# Altium PCB Inverted_Pendulum_Cape.PcbDoc
Units mil, origin at the board's own origin, x right, y up, seen from the top; angles counter-clockwise.
Board outline 3400 x 2150 mil, 2 copper layers (Top, Bottom), stack 61.902 mil thick; 17 components, 22 nets, 143 pads, 7 vias.
Unrouted connection lines stored in the file: 1.
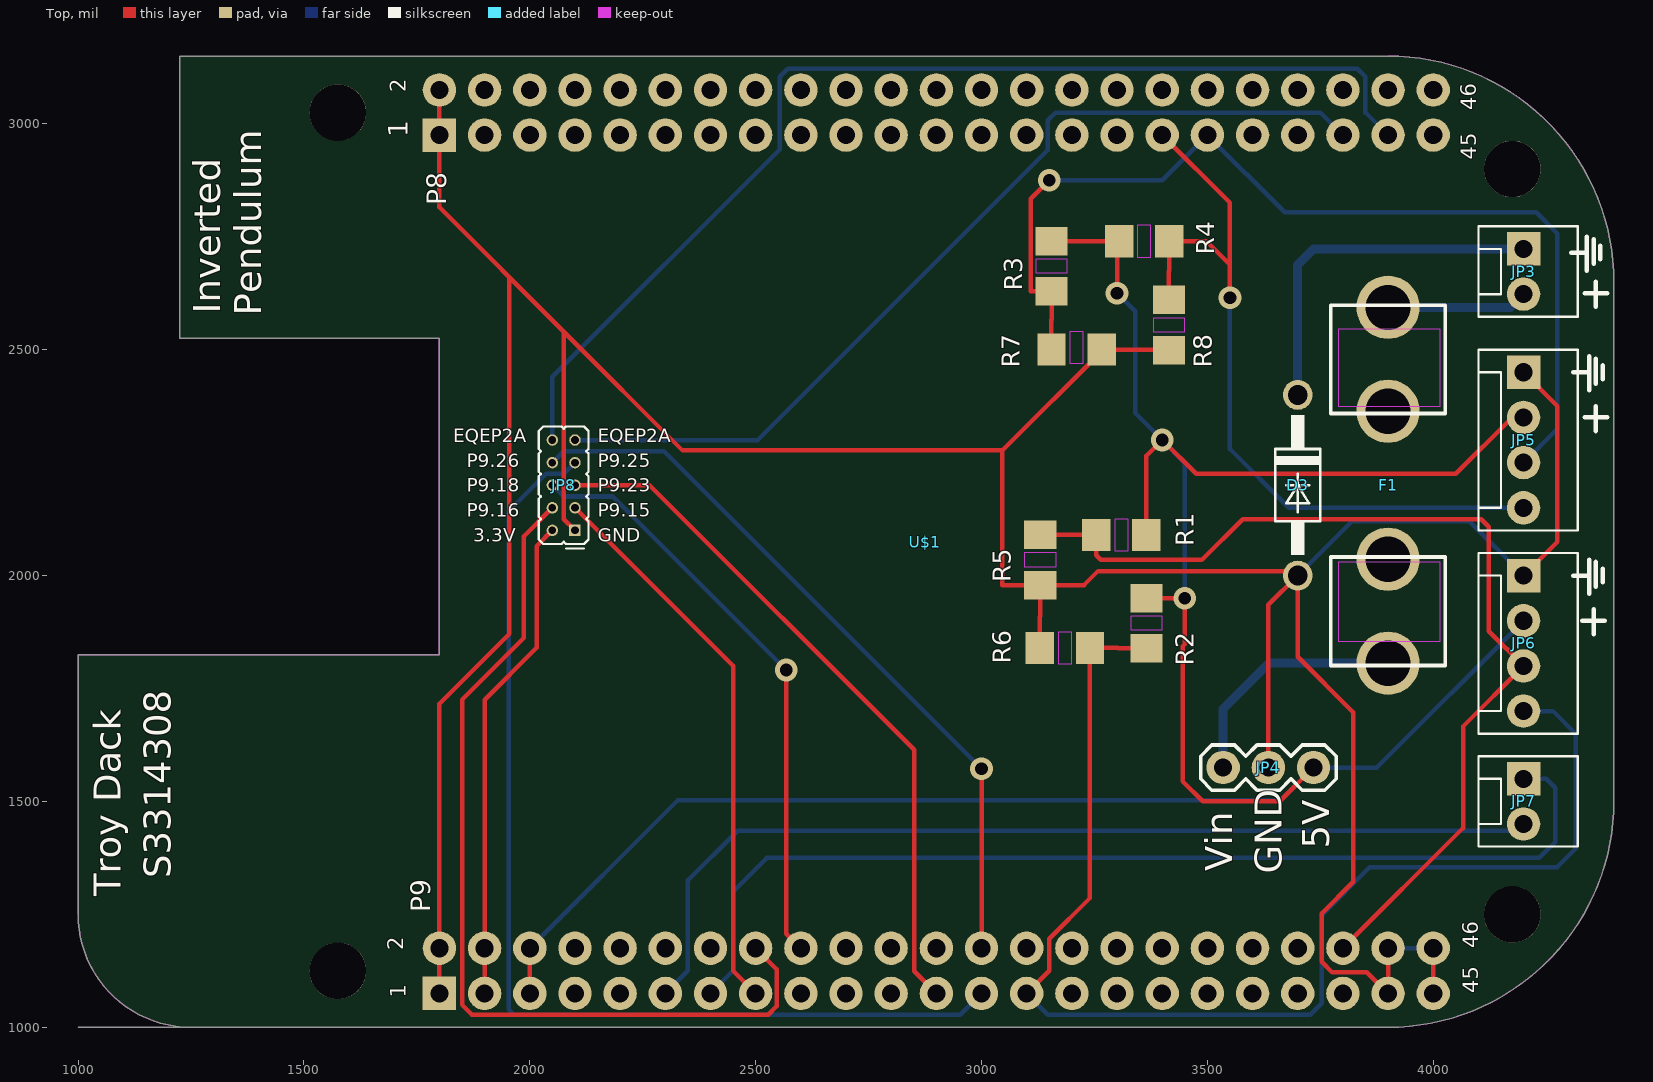
[diagram p0: Top view]
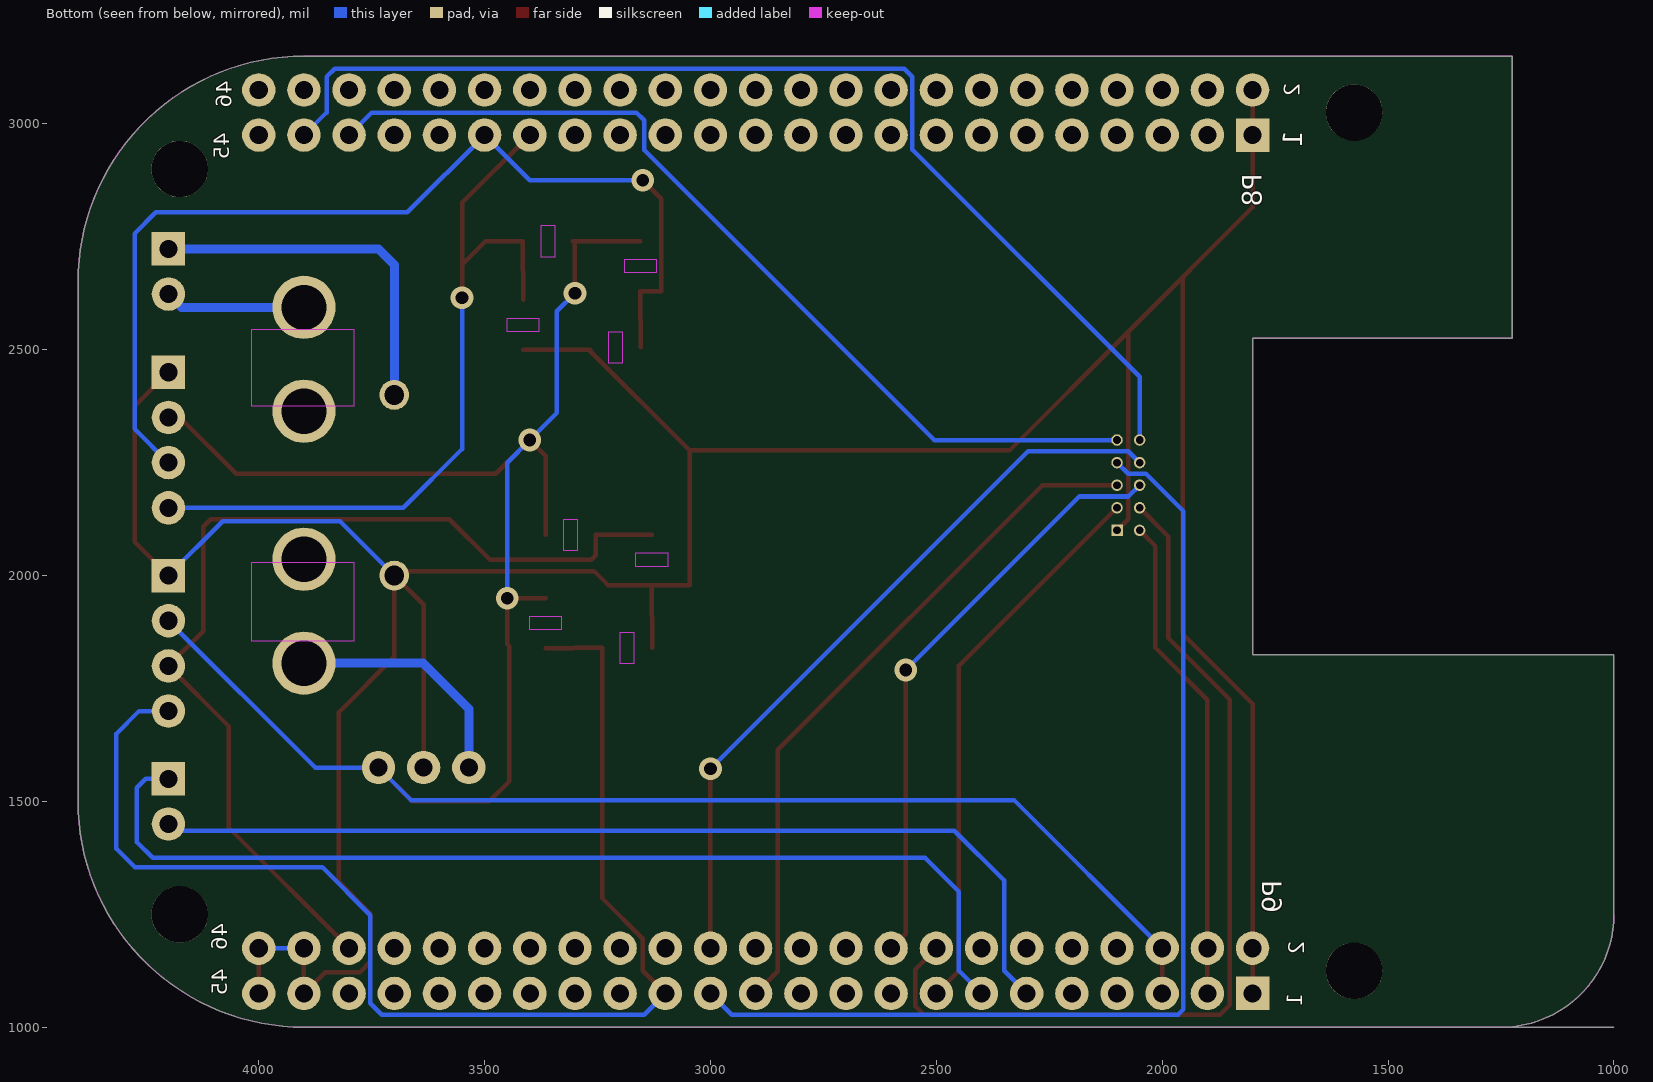
[diagram p1: Bottom view, seen from below]

## Layer stack, top to bottom
Top: signal copper 1.4016
Dielectric: core 59.0984, FR-4, Dk 4.8
Bottom: signal copper 1.4016

## Board outline
1250,1000 cw(c1250,1250) 1000,1250 1000,1825 1800,1825 1800,2525 1225,2525 1225,3150 3900,3150 cw(c3900,2650) 4400,2650 4400,1500 cw(c3900,1500) 3900,1000 1000,1000

## Design rules (kind name [scope] priority, off if disabled: settings)
AssemblyTestPointUsage SilkToBoardRegionClearance [All] p2:
AssemblyTestPointUsage UnpouredPolygon [All] p3:
Clearance [All] p1: gap=5
FabricationTestPointUsage TestPointUsage [All] p1: valid=0 allowmultiple=FALSE
FabricationTestpoint Testpoint [(IsPad And (OnTopLayer Or OnBottomLayer))] p1: side=3 testpointundercomponent=TRUE minsize=40 maxsize=100 preferedsize=60 minholesize=0 maxholesize=40 preferedholesize=32 testpointgrid=1 allowsidetop=TRUE allowsidebottom=TRUE usegrid=TRUE gridtolerance=0.01
PlaneClearance [All] p1: clearance=59.06
PlaneConnect [All] p1: planeconnectstyle=Relief reliefexpansion=20 reliefentries=4 reliefconductorwidth=39.37 reliefairgap=10
PolygonConnect [All] p1: connectstyle=Direct reliefconductorwidth=59.06 reliefentries=4 polygonreliefangle="90 Angle" airgapwidth=10
RoutingLayers Power [InNet('3.3V') Or InNet('5V') Or InNet('VIN')] p1: top layer_v5=TRUE bottom layer_v5=TRUE
RoutingLayers GND [InNet('GND')] p2: top layer_v5=TRUE bottom layer_v5=TRUE
RoutingLayers [All] p3: top layer_v5=TRUE bottom layer_v5=TRUE
RoutingVias [All] p1: holewidth=28 width=50 viastyle="Through Hole" minholewidth=28 minwidth=50 maxholewidth=28 maxwidth=50
SMDNeckDown [All] p1: percent=50.000
SilkToSolderMaskClearance SilkscreenOverComponentPads [IsPad] p1: minsilkscreentomaskgap=10 clearancetoexposedcopper=TRUE
SolderMaskExpansion [All] p1: expansion=4
Width "Input Power" [InNet('NetF1_1') Or InNet('NetD3_C') Or InNet('VIN')] p1: maxlimit=40 minlimit=10 preferedwidth=20 minimp=50.000000 maximp=50.000000 favimp=50.000000
Width [All] p2: maxlimit=196.85 minlimit=10 preferedwidth=10 minimp=50.000000 maximp=50.000000 favimp=50.000000
22 further rules are at their usual default settings.

## Components (designator, comment, footprint, x,y, rotation, side; value= is the part's Value field where it differs from the comment)
D3 "1N4004" DO41-10 3700,2200 r270 top
F1 "FUSEX20MM" FUSE_5MM 3900,2200 r180 top
JP3 "Vin" MOLEX-1X2 4200,2723 r270 top
JP4 "Regulator" 1X03 3735,1575 r180 top
JP5 "Enc2" MOLEX-1X4 4200,2450 r270 top
JP6 "Enc1" MOLEX-1X4 4200,2000 r270 top
JP7 "UART" MOLEX-1X2 4200,1550 r270 top
JP8 "Keys" 2X5_PTH_SILK_.05 2100,2350 r180 top
R1 "RESISTOR1206" 1206 3310,2090 r180 top
R2 "RESISTOR1206" 1206 3365,1895 r270 top
R3 "RESISTOR1206" 1206 3155,2685 r270 top
R4 "RESISTOR1206" 1206 3360,2740 r0 top
R5 "RESISTOR1206" 1206 3130,2035 r270 top
R6 "RESISTOR1206" 1206 3185,1840 r180 top
R7 "RESISTOR1206" 1206 3210,2500 r0 top
R8 "RESISTOR1206" 1206 3415,2555 r270 top
U$1 "BEAGLE_BONE_BLACK_CAPE" BEAGLE_BONE_BLACK_CAPE 1000,1000 r0 top locked

## Footprints (in the part's own frame and the unit in brackets; to place one, negate y for a bottom-side part, rotate by r counter-clockwise, add the part's x,y. Pads: shape width x height; smd on the part's side, far side on the other; paste and mask are expansions set on the pad)
1X03 [mil] "1X03"
  round 74 hole 40: 1(0,0) 2(100,0) 3(200,0)
  silkscreen extent -50,-50 250,50
2X5_PTH_SILK_.05 [mil] "2X5_PTH_SILK_.05"
  rect 25.5x25.5 hole 17: 1(0,250)
  round 25.5 hole 17: 2(50,250) 3(0,200) 4(50,200) 5(0,150) 6(50,150) 7(0,100) 8(50,100) 9(0,50) 10(50,50)
  silkscreen extent -30,20 80,290
1206 [mil]
  rect 63x71 smd: 1(-55.12,0) 2(56,0)
BEAGLE_BONE_BLACK_CAPE [mil] "BEAGLE_BONE_BLACK_CAPE"
  round 125 hole 125: 1(575,125) 1(575,2025) 1(3175,250) 1(3175,1900)
  rect 74x74 hole 40: P8.1(800,1975) P9.1(800,75)
  round 74 hole 40: P8.2(800,2075) P8.3(900,1975) P8.4(900,2075) P8.5(1000,1975) P8.6(1000,2075) P8.7(1100,1975) P8.8(1100,2075) P8.9(1200,1975) P8.10(1200,2075) P8.11(1300,1975) P8.12(1300,2075) P8.13(1400,1975) P8.14(1400,2075) P8.15(1500,1975) P8.16(1500,2075) P8.17(1600,1975) P8.18(1600,2075) P8.19(1700,1975) P8.20(1700,2075) P8.21(1800,1975) P8.22(1800,2075) P8.23(1900,1975) P8.24(1900,2075) P8.25(2000,1975) P8.26(2000,2075) P8.27(2100,1975) P8.28(2100,2075) P8.29(2200,1975) P8.30(2200,2075) P8.31(2300,1975) P8.32(2300,2075) P8.33(2400,1975) P8.34(2400,2075) P8.35(2500,1975) P8.36(2500,2075) P8.37(2600,1975) P8.38(2600,2075) P8.39(2700,1975) P8.40(2700,2075) P8.41(2800,1975) P8.42(2800,2075) P8.43(2900,1975) P8.44(2900,2075) P8.45(3000,1975) P8.46(3000,2075) P9.2(800,175) P9.3(900,75) P9.4(900,175) P9.5(1000,75) P9.6(1000,175) P9.7(1100,75) P9.8(1100,175) P9.9(1200,75) P9.10(1200,175) P9.11(1300,75) P9.12(1300,175) P9.13(1400,75) P9.14(1400,175) P9.15(1500,75) P9.16(1500,175) P9.17(1600,75) P9.18(1600,175) P9.19(1700,75) P9.20(1700,175) P9.21(1800,75) P9.22(1800,175) P9.23(1900,75) P9.24(1900,175) P9.25(2000,75) P9.26(2000,175) P9.27(2100,75) P9.28(2100,175) P9.29(2200,75) P9.30(2200,175) P9.31(2300,75) P9.32(2300,175) P9.33(2400,75) P9.34(2400,175) P9.35(2500,75) P9.36(2500,175) P9.37(2600,75) P9.38(2600,175) P9.39(2700,75) P9.40(2700,175) P9.41(2800,75) P9.42(2800,175) P9.43(2900,75) P9.44(2900,175) P9.45(3000,75) P9.46(3000,175)
DO41-10 [mil] "DO41-10"
  round 66 hole 44: A(200,0) C(-200,0)
  silkscreen extent -155,-50 155,50
FUSE_5MM [mil] "FUSE_5MM"
  round 140 hole 100: 1(0,-393.7) 2(0,-163.7) 3(0,164) 4(0,394)
  silkscreen extent -127,-399 127,399
MOLEX-1X2 [mil] "MOLEX-1X2"
  rect 74x74 hole 40: 1(0,0)
  round 74 hole 40: 2(100,0)
  silkscreen extent -50,-100 150,120
MOLEX-1X4 [mil] "MOLEX-1X4"
  rect 74x74 hole 40: 1(0,0)
  round 74 hole 40: 2(100,0) 3(200,0) 4(300,0)
  silkscreen extent -50,-100 350,120

## Part data
D3: "<B>DIODE</B><p> / general purpose rectifier, 1 A"
JP3 JP7: library part M02POLAR, "Standard 2-pin 0.1\" header. Use with <br> / - straight break away headers ( PRT-00116)<br> / - right angle break away headers (PRT-00553)<br> / - swiss pins (PRT-00743)<br> / - machine pins (PRT-00117)<br> / - female headers (PRT-00115)<br><br> /  Molex polarized connector foot print use with: PRT-08233 with associated crimp pins and housings.<br><br> / 2.54_SCREWTERM for use with  PRT-10571.<br><br> / 3.5mm Screw Terminal footprints for  PRT-08084<br><br> / 5mm Screw Terminal footprints for use with PRT-08432"
JP4: library part M03PTH, "<b>Header 3</b> / Standard 3-pin 0.1\" header. Use with straight break away headers (SKU : PRT-00116), right angle break away headers (PRT-00553), swiss pins (PRT-00743), machine pins (PRT-00117), and female headers (PRT-00115). Molex polarized connector foot print use with SKU : PRT-08232 with associated crimp pins and housings."
JP5 JP6: library part M04POLAR, "<b>Header 4</b> / Standard 4-pin 0.1\" header. Use with straight break away headers (SKU : PRT-00116), right angle break away headers (PRT-00553), swiss pins (PRT-00743), machine pins (PRT-00117), and female headers (PRT-00115). Molex polarized connector foot print use with SKU : PRT-08231 with associated crimp pins and housings. 1MM SMD Version SKU: PRT-10208"
JP8: library part M05X20.05_IN_PTH_SILK, "<b>Header 5x2</b> / Standard 10-pin dual row 0.1\" header. Commonly used with AVR-ISP. Use with Spark Fun Electronics SKU: PRT-00778"

## Via types
v1: diameter 50, hole 28, Top to Bottom, 7 vias

## Nets (pads, with @x,y where several pads share a name; then routed paths per layer and width w, separated by ;. In a path a pad name is that pad's centre, name@x,y a point inside that pad or via, vN(x,y) a via of type N, cw(c..) or ccw(c..) an arc to the next point about the centre after c; other vN are vias at no path point)
3.3V: JP8.2 U$1.P9.3 U$1.P9.4 | length 1087.1
  Top w10: U$1.P9.3 U$1.P9.4 1900,1725 2015,1840 2015,2065 JP8.2
5V: JP4.1 JP5.2 JP6.2 R1.1 R2.1 R3.1 R4.1 U$1.P9.5 U$1.P9.6 | length 5529.2
  Top w10: U$1.P9.5 U$1.P9.6 ; R3.1 R4.1@3304.76,2740.12 ; v1(3300,2625) R4.1@3300,2735.12 ; R2.1@3365.12,1950 v1(3450,1950) 3450,1848.12 ; R1.1 3365.12,2265.12 v1(3400,2300) 3475,2225 4050,2225 4175,2350 JP5.2 ; 3445,1843.12 3445,1545 3490,1500 3660,1500 JP4.1
  Bottom w10: U$1.P9.6 2328,1503 3663,1503 JP4.1 3875,1575 JP6.2 ; v1(3300,2625) 3340,2585 3340,2360 v1(3400,2300) 3450,2250 v1(3450,1950)
EQEP0A_IN: JP6.3 R1.2 R5.1 U$1.P9.42 | length 2217.1
  Top w10: R5.1 3191,2090.12 3191.12,2090 R1.2 3254,2045 3264,2035 3488,2035 3578,2125 4106,2125 4123,2108 4123,1877 JP6.3 4066,1666 4066,1441 U$1.P9.42
EQEP0B_IN: JP6.4 R2.2 R6.1 U$1.P9.27 | length 2839.8
  Top w10: U$1.P9.27 3150,1125 3150,1196 3240.12,1286.12 R6.1 3302,1840 3303,1839 R2.2
  Bottom w10: U$1.P9.27 3147,1028 3728,1028 3753,1053 3753,1248 3859,1354 4274,1354 4315,1395 4315,1650 4265,1700 JP6.4
EQEP1A_IN: JP5.3 R3.2 R7.1 U$1.P8.35 | length 2227.8
  Top w10: v1(3150,2875) 3109,2834 3109,2629 R3.2 3155,2566.12 3154.88,2566 R7.1@3154.88,2505
  Bottom w10: v1(3150,2875) 3400,2875 U$1.P8.35 3671,2804 4228,2804 4275,2757 4275,2325 JP5.3
EQEP1B_IN: JP5.4 R4.2 R8.1 U$1.P8.33 | length 1746.8
  Top w10: U$1.P8.33 3550,2825 3550,2688 ; R8.1 3415,2674 3416,2675 R4.2 3498,2740 3550,2688 ; v1(3550,2615) 3550,2688
  Bottom w10: v1(3550,2615) 3550,2280 3680,2150 JP5.4
EQEP2A_IN: JP8.9 U$1.P8.41 | length 2059.7
  Bottom w10: JP8.9 2505,2300 3147,2942 3147,3008 3164,3025 3750,3025 U$1.P8.41
EQEP2B_IN: JP8.10 U$1.P8.43 | length 2474
  Bottom w10: JP8.10 2050,2440 2553,2943 2553,3104 2571,3122 3832,3122 3850,3104 3850,3025 U$1.P8.43
GND: D3.A JP4.2 JP5.1 JP6.1 JP8.1 R5.2 R6.2 R7.2 R8.2 U$1.P8.1 U$1.P8.2 U$1.P9.1 U$1.P9.2 U$1.P9.43 U$1.P9.44 U$1.P9.45 U$1.P9.46 | length 8374.7
  Top w10: U$1.P9.1 U$1.P9.2 1800,1716 1955,1871 1955,2660 ; U$1.P8.2 U$1.P8.1 1800,2815 2075,2540 ; JP8.1 2075,2125 2075,2540 ; R6.2 3129,1909 3130,1910 R5.2 ; R7.2 R7.2@3269.14,2500 ; R8.2@3414,2500 R7.2@3269.14,2500 ; JP4.2 3635,1935 D3.A ; U$1.P9.44 U$1.P9.43 3853,1122 3776,1122 3753,1145 3753,1252 3823,1322 3823,1697 3700,1820 D3.A ; U$1.P9.45 U$1.P9.46 ; JP6.1 4275,2075 4275,2375 JP5.1 ; 2075,2540 2338.14,2276.86 3046,2276.86 ; 3046,2276.86 3046,1979 R5.2 ; 3046,2276.86 R7.2@3269.14,2500 ; R5.2 3227,1979 3258,2010 3690,2010 D3.A
  Bottom w10: D3.A 3820,2120 4080,2120 JP6.1 ; U$1.P9.44 U$1.P9.46
NetD3_C: D3.C JP3.1 | length 802.5
  Bottom w20: D3.C 3700,2688 3735,2723 JP3.1
NetF1_1: F1.1 JP3.2 | length 312.1
  Bottom w20: F1.1 4170.7,2593.7 JP3.2
P9.15: JP8.3 U$1.P9.15 | length 1240.7
  Top w10: JP8.3 2450,1800 2450,1125 U$1.P9.15
P9.16: JP8.4 U$1.P9.16 | length 2044.3
  Top w10: JP8.4 1987,2087 1987,1862 1850,1725 1850,1050 1872,1028 2528,1028 2547,1047 2547,1128 U$1.P9.16
P9.18: JP8.6 U$1.P9.18 | length 1316.7
  Top w10: v1(2568,1791) 2568,1207 U$1.P9.18
  Bottom w10: JP8.6 2075,2175 2184,2175 v1(2568,1791)
P9.23: JP8.5 U$1.P9.23 | length 1553
  Top w10: JP8.5 2265,2200 2851,1614 2851,1124 U$1.P9.23
P9.25: JP8.7 U$1.P9.25 | length 2365.2
  Bottom w10: JP8.7 2075,2225 2036,2225 1953,2142 1953,1040 1965,1028 2953,1028 U$1.P9.25
P9.26: JP8.8 U$1.P9.26 | length 1648.5
  Top w10: U$1.P9.26 v1(3000,1572)
  Bottom w10: JP8.8 2075,2275 2297,2275 v1(3000,1572)
SCL: U$1.P9.19
SDA: U$1.P9.20
UART1_RX: JP7.2 U$1.P9.11 | length 2172.5
  Bottom w10: U$1.P9.11 2350,1125 2350,1325 2460,1435 4185,1435 JP7.2
UART1_TX: JP7.1 U$1.P9.13 | length 2309.6
  Bottom w10: U$1.P9.13 2450,1125 2450,1300 2525,1375 4235,1375 4270,1410 4270,1530 4250,1550 JP7.1
VIN: F1.3 JP4.3 | length 536.8
  Bottom w20: JP4.3 3535,1705 3636,1806 3900,1806
pads on no net: F1.2 F1.4 U$1.1 U$1.P8.3 U$1.P8.4 U$1.P8.5 U$1.P8.6 U$1.P8.7 U$1.P8.8 U$1.P8.9 U$1.P8.10 U$1.P8.11 U$1.P8.12 U$1.P8.13 U$1.P8.14 U$1.P8.15 U$1.P8.16 U$1.P8.17 U$1.P8.18 U$1.P8.19 U$1.P8.20 U$1.P8.21 U$1.P8.22 U$1.P8.23 U$1.P8.24 U$1.P8.25 U$1.P8.26 U$1.P8.27 U$1.P8.28 U$1.P8.29 U$1.P8.30 U$1.P8.31 U$1.P8.32 U$1.P8.34 U$1.P8.36 U$1.P8.37 U$1.P8.38 U$1.P8.39 U$1.P8.40 U$1.P8.42 U$1.P8.44 U$1.P8.45 U$1.P8.46 U$1.P9.7 U$1.P9.8 U$1.P9.9 U$1.P9.10 U$1.P9.12 U$1.P9.14 U$1.P9.17 U$1.P9.21 U$1.P9.22 U$1.P9.24 U$1.P9.28 U$1.P9.29 U$1.P9.30 U$1.P9.31 U$1.P9.32 U$1.P9.33 U$1.P9.34 U$1.P9.35 U$1.P9.36 U$1.P9.37 U$1.P9.38 U$1.P9.39 U$1.P9.40 U$1.P9.41

## Keep-outs
Keep-Out Layer:
  rectangle: 3120,2670 3190,2700
  rectangle: 3195,2470 3225,2540
  rectangle: 3380,2540 3450,2570
  rectangle: 3345,2705 3375,2775
  rectangle: 3330,1880 3400,1910
  rectangle: 3170,1805 3200,1875
  rectangle: 3095,2020 3165,2050
  rectangle: 3295,2055 3325,2125
  rectangle: 3790,1855 4015,2030
  rectangle: 3790,2375 4015,2545
  lines w0: 1000,1250 ccw(c1250,1250) 1250,1000 3900,1000 ccw(c3900,1500) 4400,1500 4400,2650 ccw(c3900,2650) 3900,3150 1225,3150 1225,2525 1800,2525 1800,1825 1000,1825 1000,1250

## Silkscreen, mask and mechanical layers (free items; w line width, h text height)
Top Overlay:
  lines w10: 4305,2715 4335,2715 ; 4310,2000 4340,2000 ; 4310,2450 4340,2450 ; 4330,1900 4380,1900 ; 4335,2350 4385,2350 ; 4335,2625 4385,2625 ; 4340,2675 4340,2750 ; 4345,1960 4345,2035 ; 4345,2410 4345,2485 ; 4355,1870 4355,1925 ; 4355,2690 4355,2745 ; 4360,1975 4360,2030 ; 4360,2320 4360,2375 ; 4360,2425 4360,2480 ; 4360,2595 4360,2650 ; 4370,2700 4370,2730 ; 4375,1985 4375,2015 ; 4375,2435 4375,2465
  text "Inverted" at 1315,2580 h60 r90
  text "Pendulum" at 1405,2575 h60 r90
  text "EQEP2A" at 1830,2295 h30
  text "EQEP2A" at 2150,2295 h30
  text "P9.26" at 1860,2240 h30
  text "P9.25" at 2150,2240 h30
  text "P9.18" at 1860,2185 h30
  text "P9.23" at 2150,2185 h30
  text "P9.16" at 1860,2130 h30
  text "P9.15" at 2150,2130 h30
  text "3.3V" at 1875,2075 h30
  text "GND" at 2150,2075 h30
  text "5V" at 3770,1395 h60 r90
  text "Vin" at 3555,1345 h60 r90
  text "GND" at 3665,1340 h60 r90
  text "S3314308" at 1205,1330 h60 r90
  text "Troy Dack" at 1095,1290 h60 r90
Dimension:
  lines w0: 1000,1250 ccw(c1250,1250) 1250,1000 3900,1000 ccw(c3900,1500) 4400,1500 4400,2650 ccw(c3900,2650) 3900,3150 1225,3150 1225,2525 1800,2525 1800,1825 1000,1825 1000,1250
bNames:
  text "v 1.0" at 1167.29,1766.01 h34
tValues:
  lines w16: 3900,1800 3900,2050 cw(c3900,2125) 3900,2200 ccw(c3900,2275) 3900,2350 3900,2600
  text "-ve" at 4090,2644 h62 r90
  text "Vin" at 4372,2554 h62 r90
  text "+ve" at 4088,2529 h62 r90
  text "-ve" at 4086,2411 h62 r90
  text "+ve" at 4088,2302 h62 r90
  text "EQEP2B_IN" at 1810.43,2279.59 h37.2
  text "EQEP2A_IN" at 2150,2279.59 h37.2
  text "Enc2" at 4375,2246 h62 r90
  text "P9.26" at 1907.13,2232.84 h37.2
  text "P9.25" at 2150,2232.84 h37.2
  text "P9.18" at 1907.1,2182.84 h37.2
  text "P9.23" at 2150,2182.84 h37.2
  text "P9.16" at 1907.13,2132.84 h37.2
  text "P9.15" at 2150,2132.84 h37.2
  text "3.3V" at 1923.23,2082.84 h37.2
  text "GND" at 2150,2082.68 h37.2
  text "-ve" at 4082,1967 h62 r90
  text "+ve" at 4087,1864 h62 r90
  text "Enc1" at 4373,1770 h62 r90
  text "12V" at 3918.95,1601.68 h37.2 r90
  text "Tx" at 4075,1546 h62 r90
  text "UART" at 4369,1432 h62 r90
  text "Rx" at 4075,1396 h62 r90
  text "5V" at 3917.11,1233.96 h37.2 r90
tDocu:
  text "Troy Dack" at 2850,600 h108.5
tKeepout:
  lines w0: 1000,1250 ccw(c1250,1250) 1250,1000 cw(c1250,1250) 1000,1250

## Dimensions
4039.13,3150.94 to 4039.13,1000.94 on Document
1000,3250 to 4400,3250 on Document

## Text inside footprints (layer, text, board x,y; h text height)
R1: tNames ">NAME" at 3360,2045 h24.8 r180
R2: tNames ">NAME" at 3410,1945 h24.8 r270
R5: tNames ">NAME" at 3175,2085 h24.8 r270
R6: tNames ">NAME" at 3235,1795 h24.8 r180
R7: tNames ">NAME" at 3160,2545 h24.8
R8: tNames ">NAME" at 3460,2605 h24.8 r270
U$1: Top Overlay "P9" at 1780,1255 h42.5 r90; Top Overlay "2" at 1720,1170 h34 r90; Top Overlay "1" at 1725,1065 h34 r90; Top Overlay "45" at 4100,1075 h34 r90; Top Overlay "46" at 4100,1175 h34 r90; Top Overlay "46" at 4095,3030 h34 r90; Top Overlay "45" at 4095,2920 h34 r90; Top Overlay "P8" at 1815,2820 h42.5 r90; Top Overlay "2" at 1725,3070 h34 r90; Top Overlay "1" at 1730,2970 h42.5 r90; Document "Cutout" at 1450,2200 h42.5 r270; Document "LED/Button" at 1080,3090 h42.5 r270; Document "Ethernet" at 1300,2200 h42.5 r270; Bottom Overlay "46" at 4070,1230 h34 r270; Bottom Overlay "45" at 4070,1130 h34 r270; Bottom Overlay "45" at 4065,2980 h34 r270; Bottom Overlay "46" at 4060,3095 h34 r270; Bottom Overlay "2" at 1695,3090 h34 r270; Bottom Overlay "2" at 1685,1190 h34 r270; Bottom Overlay "1" at 1690,1075 h34 r270; Bottom Overlay "1" at 1690,2985 h42.5 r270; Bottom Overlay "P9" at 1735,1325 h42.5 r270; Bottom Overlay "P8" at 1780,2890 h42.5 r270